# EAGLE board SleepSureStandAloneV2 (EAGLE 9.6.2)
REV: C
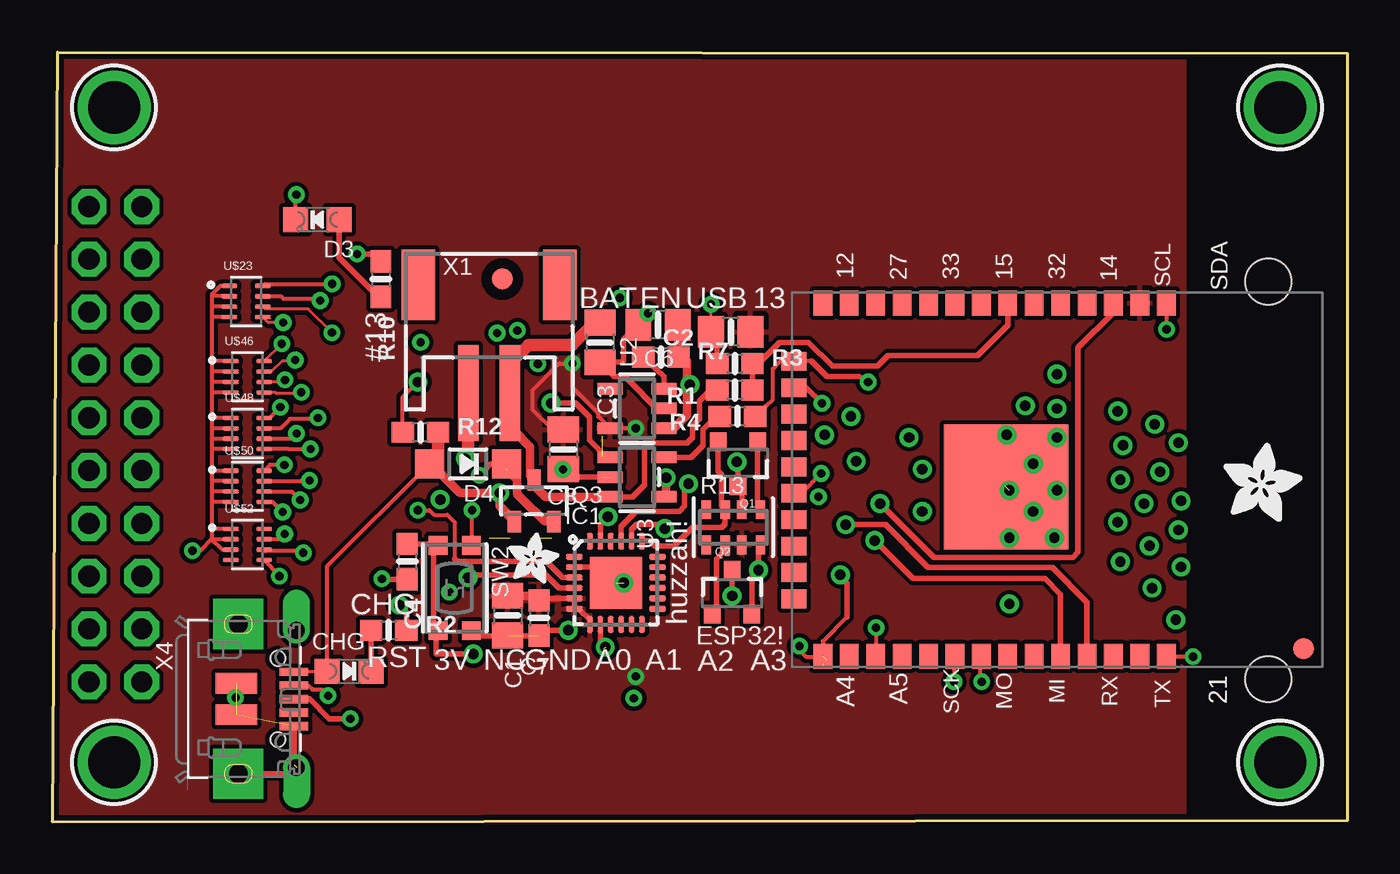
[diagram p0: board, top side]
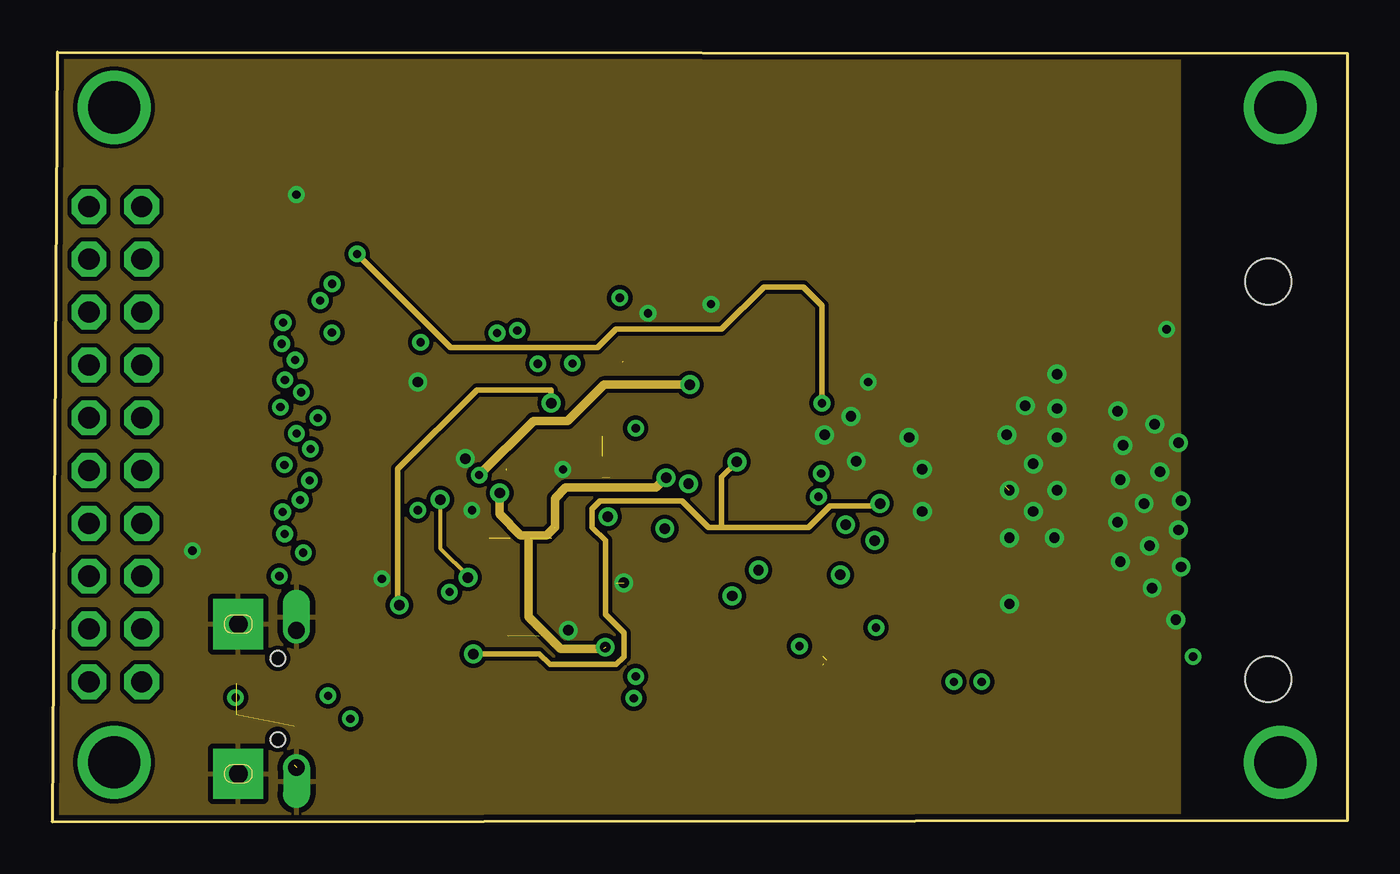
[diagram p1: board, inner layer Route2]
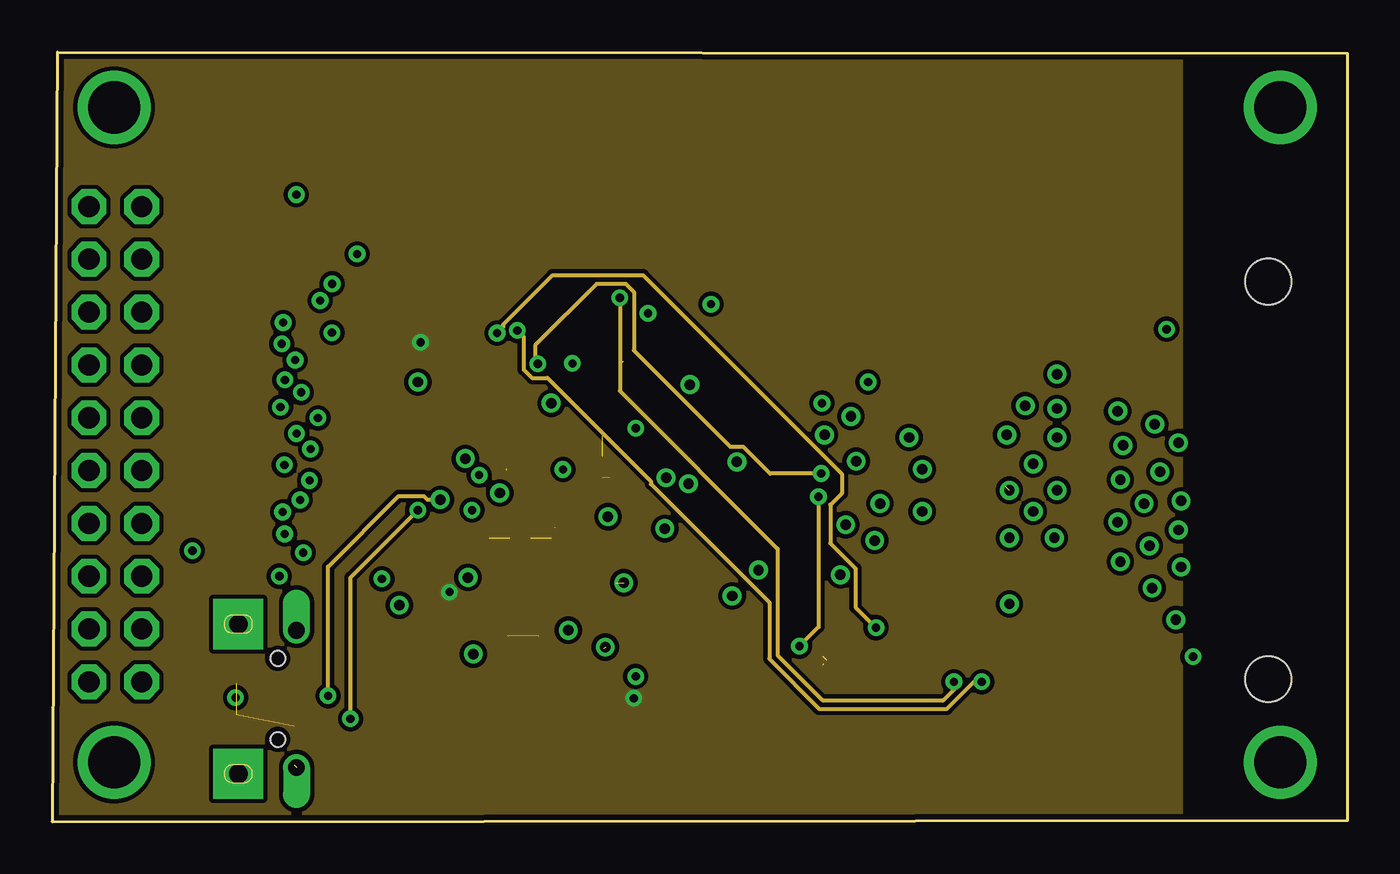
[diagram p2: board, inner layer Route15]
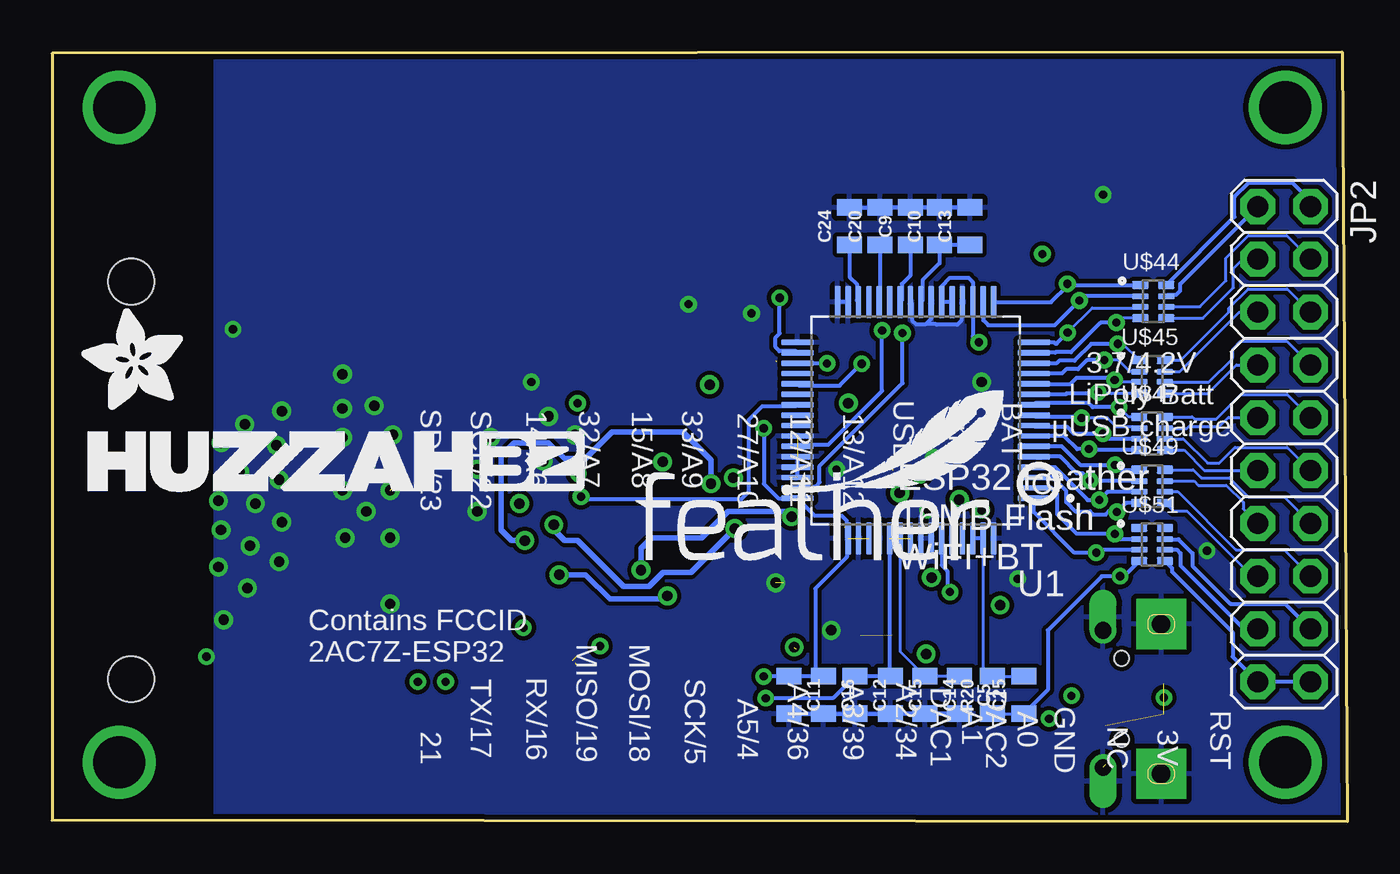
[diagram p3: board, bottom side, seen from below]

Size 62.29 x 37.02 mm. Coordinates in mm from the lower left corner, seen from the top.
Outline: 0.25,37.02 62.29,36.96 62.29,0.06 0,0 0.25,37.02
Copper layers (1+2*15+16): Top 0.035mm / dielectric 1.5mm / Route2 0.035mm / dielectric 0.15mm / Route15 0.035mm / dielectric 0.2mm / Bottom 0.035mm
Design rules "adafruit 7-7 *": minimum track width 6mil, minimum drill 15.5mil, track to track 8mil, track to pad 7mil, pad to pad 7mil, via to via 7mil, smd to smd 7mil, copper to edge 10mil, drill to drill 8mil, minimum pad ring 10mil, minimum via ring 8mil, stop-mask expansion 2mil, vias tented up to drill 20mil, thermal gap 10mil
Net classes: 0 default: width 0.152 mm, drill 0.305 mm, clearance 0.152 mm; 1 DiffPairs: width 0.152 mm, drill 0.305 mm, clearance 0.152 mm; 2 PWR: width 0.203 mm, drill 0.305 mm, clearance 0.203 mm
Holes 2.2 mm at 58.48,6.86 58.48,25.97

## Footprints (pad centres in the part's own frame; a part is rotated, then mirrored left to right if it is on the bottom)
0805-NO = smd 1.24 x 1.5: 1 -0.95,0; 2 0.95,0
0603-NO = smd 1.075 x 1: 1 -0.85,0; 2 0.85,0
0805 = smd 0.8 x 1.2: 1 -0.9,0; 2 0.9,0
CHIPLED_0805_NOOUTLINE = smd 1.2 x 1.2: A 0,-1.05; C 0,1.05
SOD-123 = smd 1.4 x 1.4: A 1.85,0; C -1.85,0
QFN24_4MM_SMSC = smd 0.8 x 0.28: 1 -2,1.25; 2 -2,0.75; 3 -2,0.25; 4 -2,-0.25; 5 -2,-0.75; 6 -2,-1.25; 13 2,-1.25; 14 2,-0.75; 15 2,-0.25; 16 2,0.25; 17 2,0.75; 18 2,1.25 | smd 0.28 x 0.8: 7 -1.25,-2; 8 -0.75,-2; 9 -0.25,-2; 10 0.25,-2; 11 0.75,-2; 12 1.25,-2; 19 1.25,2; 20 0.75,2; 21 0.25,2; 22 -0.25,2; 23 -0.75,2; 24 -1.25,2 | smd 2.5 x 2.5: THERM 0,0
2X09-BIG = drill 1.016 pad 1.676 octagon: 1 -10.16,-1.27; 2 -10.16,1.27; 3 -7.62,-1.27; 4 -7.62,1.27; 5 -5.08,-1.27; 6 -5.08,1.27; 7 -2.54,-1.27; 8 -2.54,1.27; 9 0,-1.27; 10 0,1.27; 11 2.54,-1.27; 12 2.54,1.27; 13 5.08,-1.27; 14 5.08,1.27; 15 7.62,-1.27; 16 7.62,1.27; 17 10.16,-1.27; 18 10.16,1.27; 19 12.7,-1.27; 20 12.7,1.27
SOT23-3 = smd 0.8 x 0.9: 1 -0.95,-1; 2 0.95,-1; 3 0,1.1
SOT23-R = smd 0.635 x 1.016: 1 -0.95,-1; 2 0.95,-1; 3 0,1
RESPACK_4X0603 = smd 0.45 x 0.9: 1 -1.3,-0.85; 2 -0.4,-0.85; 3 0.4,-0.85; 4 1.3,-0.85; 5 1.3,0.85; 6 0.4,0.85; 7 -0.4,0.85; 8 -1.3,0.85
BTN_KMR2_4.6X2.8 = smd 0.9 x 0.9: A 2.05,0.8; A' -2.05,0.8; B 2.05,-0.8; B' -2.05,-0.8
QFP50P1200X1200X120-64N = smd 1.56 x 0.28: 1 -5.68,3.75; 2 -5.68,3.25; 3 -5.68,2.75; 4 -5.68,2.25; 5 -5.68,1.75; 6 -5.68,1.25; 7 -5.68,0.75; 8 -5.68,0.25; 9 -5.68,-0.25; 10 -5.68,-0.75; 11 -5.68,-1.25; 12 -5.68,-1.75; 13 -5.68,-2.25; 14 -5.68,-2.75; 15 -5.68,-3.25; 16 -5.68,-3.75; 33 5.68,-3.75; 34 5.68,-3.25; 35 5.68,-2.75; 36 5.68,-2.25; 37 5.68,-1.75; 38 5.68,-1.25; 39 5.68,-0.75; 40 5.68,-0.25; 41 5.68,0.25; 42 5.68,0.75; 43 5.68,1.25; 44 5.68,1.75; 45 5.68,2.25; 46 5.68,2.75; 47 5.68,3.25; 48 5.68,3.75 | smd 0.28 x 1.56: 17 -3.75,-5.68; 18 -3.25,-5.68; 19 -2.75,-5.68; 20 -2.25,-5.68; 21 -1.75,-5.68; 22 -1.25,-5.68; 23 -0.75,-5.68; 24 -0.25,-5.68; 25 0.25,-5.68; 26 0.75,-5.68; 27 1.25,-5.68; 28 1.75,-5.68; 29 2.25,-5.68; 30 2.75,-5.68; 31 3.25,-5.68; 32 3.75,-5.68; 49 3.75,5.68; 50 3.25,5.68; 51 2.75,5.68; 52 2.25,5.68; 53 1.75,5.68; 54 1.25,5.68; 55 0.75,5.68; 56 0.25,5.68; 57 -0.25,5.68; 58 -0.75,5.68; 59 -1.25,5.68; 60 -1.75,5.68; 61 -2.25,5.68; 62 -2.75,5.68; 63 -3.25,5.68; 64 -3.75,5.68
SOT23-5 = smd 0.55 x 1.2: 1 -0.95,-1.3; 2 0,-1.3; 3 0.95,-1.3; 4 0.95,1.3; 5 -0.95,1.3
MOUNTINGHOLE_2.5_PLATED = drill 2.5 pad 3.2: P$1 0,0
CAPCAXE50P210X130X94-8N = smd 0.77 x 0.21: 1 -0.8,0.75; 2 -0.8,0.25; 3 -0.8,-0.25; 4 -0.8,-0.75; 5 0.8,-0.75; 6 0.8,-0.25; 7 0.8,0.25; 8 0.8,0.75
FIDUCIAL_1MM = smd 1 x 1: 1 0,0
RESCAXS50P200X100X45-8N = smd 0.79 x 0.39: 1 -0.62,0.8; 4 -0.62,-0.8; 5 0.62,-0.8; 8 0.62,0.8 | smd 0.79 x 0.29: 2 -0.62,0.25; 3 -0.62,-0.25; 6 0.62,-0.25; 7 0.62,0.25
JSTPH2 = smd 1 x 4.6: 1 -1,-3.7; 2 1,-3.7 | smd 1.6 x 3.4: NC1 -3.4,1.5; NC2 3.4,1.5
WROOM32_SKINNY = smd 1.2 x 0.9: 1 -8.5,5; 2 -8.5,3.73; 3 -8.5,2.46; 4 -8.5,1.19; 5 -8.5,-0.08; 6 -8.5,-1.35; 7 -8.5,-2.62; 8 -8.5,-3.89; 9 -8.5,-5.16; 10 -8.5,-6.43; 11 -8.5,-7.7; 12 -8.5,-8.97; 13 -8.5,-10.24; 14 -8.5,-11.51; 25 8.5,-11.51; 26 8.5,-10.24; 27 8.5,-8.97; 28 8.5,-7.7; 29 8.5,-6.43; 30 8.5,-5.16; 31 8.5,-3.89; 32 8.5,-2.62; 33 8.5,-1.35; 34 8.5,-0.08; 35 8.5,1.19; 36 8.5,2.46; 37 8.5,3.73; 38 8.5,5 | smd 0.9 x 1.2: 15 -5.7,-12.9; 16 -4.43,-12.9; 17 -3.16,-12.9; 18 -1.89,-12.9; 19 -0.62,-12.9; 20 0.65,-12.9; 21 1.92,-12.9; 22 3.19,-12.9; 23 4.46,-12.9; 24 5.73,-12.9 | smd 6 x 6: P$1 0.34,-2.7
4UCONN_20329_V2 = smd 1 x 2: BASE@1 -0.75,-2; BASE@2 0.75,-2 | smd 0.4 x 1.35: D+ 0,0.775; D- -0.65,0.775; GND 1.3,0.775; ID 0.65,0.775; VBUS -1.3,0.775 | drill 0.8 pad 1.143 offset: SPRT@1 -3.3,0.9; SPRT@2 3.3,0.9 | drill 0.9 pad 2.413 square: SPRT@3 -3.6,-1.9; SPRT@4 3.6,-1.9 | hole 0.7: -1.95,0; 1.95,0

## Placement (x,y rotation side)
C1  10uF  [0805-NO]  21.91,9.92 270 top
C2  10uF  [0805-NO]  32.64,23.56 180 top
C3  10µF  [0805-NO]  26.35,23.05 270 top
C4  1uF  [0603-NO]  17.08,12.51 270 top
C5  1uF  [0805]  18.67,6.1 270 bottom
C6  10µF  [0805-NO]  29.14,23.9 180 top
C7  1uF  [0603-NO]  23.41,9.79 270 top
C8  10µF  [0805-NO]  24.59,17.91 270 top
C9  1uF  [0805]  21.02,28.64 90 bottom
C10  10uF  [0805]  19.62,28.64 90 bottom
C11  1uF  [0805]  26.86,6.1 270 bottom
C12  1uF  [0805]  23.69,6.1 270 bottom
C13  0.1uF  [0805]  18.16,28.64 90 bottom
C14  0.1uF  [0805]  20.32,6.1 270 bottom
C15  0.1uF  [0805]  21.97,6.1 270 bottom
C16  0.1uF  [0805]  25.21,6.1 270 bottom
C20  100uF  [0805]  22.48,28.64 90 bottom
C24  1uF  [0805]  23.94,28.64 90 bottom
C25  1nF  [0805]  15.56,6.1 90 bottom
CHG  ORANGE  [CHIPLED_0805_NOOUTLINE]  14.29,7.24 270 top
D3  RED  [CHIPLED_0805_NOOUTLINE]  12.76,28.96 90 top
D4  MBR120  [SOD-123]  20,17.21 180 top
FRAME2  FRAME-LEDGER  [CREATIVE_COMMONS]  -0.13,0.06 0 top
IC1  CP2104  [QFN24_4MM_SMSC]  27.11,11.49 0 top
JP2  [2X09-BIG]  3.05,19.43 270 bottom
Q1  mmbt2222  [SOT23-3]  32.98,17.27 180 top
Q2  mmbt2222  [SOT23-3]  32.7,10.99 0 top
Q3  DMG3415U  [SOT23-R]  23.18,15.43 0 top
R1  100K  [0603-NO]  32.83,20.76 180 top
R2  1K  [0603-NO]  16.19,9.21 0 top
R3  100K  [0603-NO]  32.83,22.03 0 top
R4  4.7K  [0603-NO]  32.96,19.49 180 top
R7  100K  [0603-NO]  29.27,22.35 0 top
R10  1K  [0603-NO]  15.81,26.1 270 top
R12  100K  [0603-NO]  17.72,18.73 0 top
R13  10K  [RESPACK_4X0603]  32.77,14.16 0 top
R20  1M  [0805]  17.08,6.1 90 bottom
SW2  KMR2  [BTN_KMR2_4.6X2.8]  19.37,11.24 270 top
U1  ADS1299-4PAG  [QFP50P1200X1200X120-64N]  20.76,19.3 180 bottom
U2  AP2112-3.3  [SOT23-5]  28.13,19.88 90 top
U3  MCP73831T-2ACI/OT  [SOT23-5]  28.13,16.57 270 top
U$6  MOUNTINGHOLE2.5  [MOUNTINGHOLE_2.5_PLATED]  2.98,34.35 0 top
U$7  [ADAFRUIT_5MM]  56.01,19.81 90 bottom
U$9  [FEATHERLOGO_MED]  34.35,12.51 0 bottom
U$13  [PCBFEAT-REV-040]  14.86,16.26 0 bottom
U$14  [ADAFRUIT_2.5MM]  21.96,11.47 0 top
U$15  [ADAFRUIT_3.5MM]  56.32,14.41 0 top
U$19  MOUNTINGHOLE2.5  [MOUNTINGHOLE_2.5_PLATED]  59.05,34.35 0 top
U$23  W2A45C103MAT2A  [CAPCAXE50P210X130X94-8N]  9.33,25.02 0 top
U$31  MOUNTINGHOLE2.5  [MOUNTINGHOLE_2.5_PLATED]  59.05,2.86 270 top
U$32  MOUNTINGHOLE2.5  [MOUNTINGHOLE_2.5_PLATED]  2.98,2.86 270 top
U$34  FIDUCIAL_1MM  [FIDUCIAL_1MM]  21.65,26.1 270 top
U$35  FIDUCIAL_1MM  [FIDUCIAL_1MM]  60.18,8.33 270 top
U$43  [HUZZAH32]  60.58,15.88 0 bottom
U$44  [RESCAXS50P200X100X45-8N]  9.33,25.02 0 bottom
U$45  [RESCAXS50P200X100X45-8N]  9.4,21.4 0 bottom
U$46  W2A45C103MAT2A  [CAPCAXE50P210X130X94-8N]  9.4,21.4 0 top
U$47  [RESCAXS50P200X100X45-8N]  9.4,18.67 0 bottom
U$48  W2A45C103MAT2A  [CAPCAXE50P210X130X94-8N]  9.4,18.67 0 top
U$49  [RESCAXS50P200X100X45-8N]  9.4,16.13 0 bottom
U$50  W2A45C103MAT2A  [CAPCAXE50P210X130X94-8N]  9.4,16.13 0 top
U$51  [RESCAXS50P200X100X45-8N]  9.4,13.33 0 bottom
U$52  W2A45C103MAT2A  [CAPCAXE50P210X130X94-8N]  9.4,13.33 0 top
X1  JSTPH  [JSTPH2]  21.02,24.32 0 top
X2  ESP32_WROOM32_SKINNY  [WROOM32_SKINNY]  48.58,16.45 270 top
X4  20329  [4UCONN_20329_V2]  10.86,5.91 270 top

## Library data of the parts
C1-C4 C6 C7 CHG D3 D4 IC1 Q3 R1-R4 R7 R10 R12 R13 SW2 U2 U3 U$7 U$14 U$15 X1 X2 X4 = microbuilder
C5 C9-C16 C20 C24 C25 = SparkFun-Capacitors; PROD_ID: CAP-11330
C8 = microbuilder; COMPANY: ADAFRUIT INDUSTRIES; DRAWN: KTOWN; REV: A
FRAME2 = SparkFun-Aesthetics; DESIGNER: Ian Romano; REV: 2
JP2 U$23 U$44-U$52 = SleepSureLib
Q1 Q2 = SparkFun
R20 = SparkFun-Resistors
U1 = ADS1299-4PAG; AVAILABILITY: Warning; DESCRIPTION: Low-Noise, 4-Channel, 24-Bit Analog-to-Digital Converter for Biopotential Measurements 64-TQFP -40 to 85; MF: Texas Instruments; MP: ADS1299-4PAG; PACKAGE: TQFP-64 Texas Instruments; PRICE: None; PURCHASE-URL: https://pricing.snapeda.com/search/part/ADS1299-4PAG/?ref=eda
U$6 U$19 U$31 U$32 U$34 U$35 = microbuilder; BOM: EXCLUDE
U$9 U$43 = silks
U$13 = microbuilder; REV: C

## Nets
1_N [DiffPairs]: JP2.3 U$44.5
1_P [DiffPairs]: JP2.4 U$44.6
2_N [DiffPairs]: JP2.5 U$45.7
2_P [DiffPairs]: JP2.6 U$45.8
3.3V: C1.1 C2.1 C7.1 C8.1 C11.1 C16.1 IC1.5 IC1.6 IC1.7 R13.3 U1.35 U1.48 U1.50 U1.52 U2.5 X2.2
3_N [DiffPairs]: JP2.7 U$45.5
3_P [DiffPairs]: JP2.8 U$45.6
4_N [DiffPairs]: JP2.9 U$47.7
4_P [DiffPairs]: JP2.10 U$47.8
5_N: JP2.11 U$47.5
5_P: JP2.12 U$47.6
5V [PWR]: C12.1 C15.1 U1.19 U1.21 U1.22 U1.54 U1.56 U1.59
6_N: JP2.13 U$49.7
6_P: JP2.14 U$49.8
7_N: JP2.15 U$49.5
7_P: JP2.16 U$49.6
8_N [PWR]: JP2.17 U$51.6
8_P [PWR]: JP2.18 U$51.7
_SRB1: U1.17 U$23.8 U$44.1
_SRB2: U1.18 U$23.7 U$44.2
A0_DAC2: X2.11
A1_DAC1: X2.10
A2_I34: X2.6
A3_I39: X2.5
A4_IO36: X2.4
A5_IO4: X2.26
A13_I35: R1.1 R3.2 X2.7
ADS_CS: Q2.3 U1.39 X2.25
ADS_RESET: U1.36
BIAS: JP2.19 JP2.20 U$51.5
BIAS_DRV: C25.1 R20.1 U$51.4 U$52.5
BIAS_IN: C25.2 R20.2 U1.62 U1.63
CLK0: U1.37 X2.20
DRDY: U1.47 X2.27
DTR: IC1.23 Q2.2 R13.4
EN: R7.1 U2.3
GND: C1.2 C2.2 C3.2 C4.2 C5.2 C6.2 C7.2 C8.2 C9.2 C10.2 C11.2 C12.2 C13.2 C14.2 C15.2 C16.2 C20.2 C24.2 D3.C IC1.2 IC1.THERM R3.1 R4.1 R12.1 SW2.A SW2.A' U1.20 U1.23 U1.25 U1.31 U1.32 U1.33 U1.42 U1.44 U1.45 U1.46 U1.49 U1.51 U1.53 U1.57 U1.58 U1.60 U1.64 U2.2 U3.2 U$23.1 U$23.2 U$23.3 U$23.4 U$46.1 U$46.2 U$46.3 U$46.4 U$48.1 U$48.2 U$48.3 U$48.4 U$50.1 U$50.2 U$50.3 U$50.4 U$52.1 U$52.2 U$52.3 X1.1 X2.1 X2.15 X2.38 X2.P$1 X4.BASE@1 X4.BASE@2 X4.GND X4.SPRT@1 X4.SPRT@2 X4.SPRT@3 X4.SPRT@4
GPIO2: X2.24
IN1_N [DiffPairs]: U1.15 U$23.5 U$44.4
IN1_P [DiffPairs]: U1.16 U$23.6 U$44.3
IN2_N [DiffPairs]: U1.13 U$45.2 U$46.7
IN2_P [DiffPairs]: U1.14 U$45.1 U$46.8
IN3_N [DiffPairs]: U1.11 U$45.4 U$46.5
IN3_P [DiffPairs]: U1.12 U$45.3 U$46.6
IN4_N [DiffPairs]: U1.9 U$47.2 U$48.7
IN4_P [DiffPairs]: U1.10 U$47.1 U$48.8
IN5_N [PWR]: U1.7 U$47.4 U$48.5
IN5_P [PWR]: U1.8 U$47.3 U$48.6
IN6_N [PWR]: U1.5 U$49.2 U$50.7
IN6_P [PWR]: U1.6 U$49.1 U$50.8
IN7_N [PWR]: U1.3 U$49.4 U$50.5
IN7_P [PWR]: U1.4 U$49.3 U$50.6
IN8_N [PWR]: U1.1 U$51.3 U$52.6
IN8_P [PWR]: U1.2 U$51.2 U$52.7
IO12_A11: X2.14
IO13_A12: R10.1 X2.16
IO14_A6: X2.13
IO15_A8: X2.23
IO17: X2.28
IO21: X2.33
IO27_A10: X2.12
IO32_A7: X2.8
IO33_A9: X2.9
MISO: U1.43 X2.31
MOSI: U1.34 X2.30
N$1: CHG.C R2.1
N$2: IC1.3 X4.D+
N$3: R2.2 U3.1
N$4: R4.2 U3.5
N$5: D3.A R10.2
N$6: IC1.4 X4.D-
N$7: C6.1 D4.C Q3.2 R7.2 U2.1
N$8: C24.1 U1.30
N$9: C20.1 U1.28
N$10: C10.1 C13.1 U1.24
N$11: C5.1 C14.1 U1.55
N$12: Q1.1 R13.5
N$13: Q2.1 R13.2
N$14: C9.1 U1.26
RESET: C4.1 Q1.3 R13.6 SW2.B SW2.B' X2.3
RTS: IC1.19 Q1.2 R13.7
RXD0: IC1.21 X2.34
SCK: X2.29
SCL: X2.36
SCLK: U1.40
SDA: X2.37
SRB1: JP2.2 U$44.8
SRB2: JP2.1 U$44.7
TXD0: IC1.20 X2.35
VBAT: C3.1 Q3.3 R1.2 U3.3 X1.2
VBUS: CHG.A D4.A IC1.8 Q3.1 R12.2 U3.4 X4.VBUS

## Tracks (layer width: path | path; a pad name or v marks a point on that pad's centre or on a via)
1_N
  Bottom 0.152: U$44.5 6.95,24.22 5.49,25.68 5.49,26.61 5.04,27.05 JP2.3
1_P
  Bottom 0.152: U$44.6 7.09,24.77 5.84,26.02 5.84,27.11 4.76,28.19 2.92,28.19 JP2.4
2_N
  Bottom 0.152: U$45.7 8.07,21.65 5.21,24.51 JP2.5
2_P
  Bottom 0.152: U$45.8 8.03,22.2 5.71,24.51 5.71,24.69 4.78,25.63 2.9,25.63 JP2.6
3.3V  (via drill 0.39)  (1 unrouted)
  Top 0.203: C8.1 24.07,18.86 23.11,19.81 23.11,20.76 24.39,22.04 v25.02,22.04 25.02,20.89 26.28,19.64 26.28,19.48 U2.5 v28.06,18.93 v28.07,18.92
  Top 0.254: IC1.7 25.86,9.7 25.32,10.24 IC1.6 IC1.5 23.48,10.74 | C7.1 23.03,10.64 | 33.21,13.35 R13.3 33.08,13.39
  Top 0.406: 24.59,18.97 C8.1 | 23.14,10.92 C7.1 | 23.48,10.74 23.48,10.71 C7.1 | C7.1 23.19,10.87 C1.1 21.52,10.48 | C2.1 33.83,23.8
  Bottom 0.203: v28.07,6.98 28.06,7 C11.1 C16.1 25.59,7.38 25.59,11.22 24.07,12.74 24.07,13.57 U1.50 24.07,13.68 24.07,14.47 24.31,14.72 25.61,14.72 U1.48 27.37,15.55 28.07,16.26 v28.07,18.92 | U1.35 25.04,22.05 v25.02,22.04
  pour Top: -0.06,37.15 54.48,37.15 54.48,-0.13 -0.06,-0.13
3_N
  Bottom 0.152: U$45.5 6.71,20.6 5.34,21.97 JP2.7
3_P
  Bottom 0.152: U$45.6 6.66,21.15 5.52,22.29 5.52,22.73 5.14,23.11 2.92,23.11 JP2.8
4_N
  Bottom 0.152: JP2.9 5.7,19.43 5.71,19.44 5.73,19.44 6.15,19.02 7.62,19.02 7.72,18.92 U$47.7
4_P
  Bottom 0.152: JP2.10 2.9,20.55 5.12,20.55 6.3,19.37 7.36,19.37 7.46,19.47 U$47.8
5_N
  Bottom 0.152: JP2.11 6.87,16.89 7.85,17.87 U$47.5
5_P
  Bottom 0.152: JP2.12 2.9,18.01 5.41,18.01 6.17,17.25 6.73,17.25 7.9,18.42 U$47.6
5V  (via drill 0.39)  (1 unrouted)
  Bottom 0.203: U1.54 22.01,7.04 C15.1 C12.1 24.74,5.94 v27.97,5.94 | U1.21 U1.22 19.51,25.76 19.11,26.16 18.22,26.16 18.01,25.95 U1.19 18.01,23.35 v17.72,23.06 | U1.59 19.51,12.33 19.24,12.06 19.24,11.18 v19.11,11.05
  pour Route15: -1.02,37.91 -1.02,-1.08 54.29,-1.08 54.29,37.91
6_N
  Bottom 0.152: U$49.7 7.37,16.38 7.17,16.18 5.83,16.18 5.02,15.37 5.02,15.05 JP2.13
6_P
  Bottom 0.152: U$49.8 7.41,16.93 7.02,16.54 5.68,16.54 4.77,15.62 3.05,15.62 JP2.14
7_N
  Bottom 0.152: JP2.15 4.6,11.81 7.73,14.94 8.39,14.94 U$49.5
7_P
  Bottom 0.152: JP2.16 3.05,13.08 5.37,13.08 8.17,15.88 U$49.6
8_N
  Bottom 0.203: JP2.17 4.99,9.27 8.04,12.32 8.04,12.91 8.21,13.08 U$51.6
8_P
  Bottom 0.203: JP2.18 2.99,10.48 5.63,10.48 7.45,12.31 7.45,12.91 8.13,13.58 U$51.7
_SRB1  (via drill 0.39)
  Top 0.203: U$23.8 10.23,25.87 v13.47,25.87
  Bottom 0.203: U1.17 14.26,24.98 13.42,25.82 | v13.47,25.87 13.42,25.82 | 13.42,25.82 U$44.1
_SRB2  (via drill 0.39)
  Top 0.203: U$23.7 11.01,25.27 11.12,25.16 12.8,25.16 v12.89,25.07
  Bottom 0.203: U1.18 17.51,24.12 17.27,23.88 14.08,23.88 v12.89,25.07 12.69,25.27 U$44.2 10.01,25.21
A13_I35
  Top 0.254: X2.7 45.96,23.88 44.49,22.42 40.2,22.42 39.69,21.91 37.53,21.91 36.39,23.05 34.99,23.05 33.97,22.03 R3.2 R1.1
ADS_CS  (via drill 0.39, 0.5)  (2 unrouted)
  Top 0.203: 36.89,7.55 37.07,7.55 | 37.12,7.62 37.26,7.76 | 38.23,9.84 37.07,8.68 X2.25 37.06,7.94 36.26,7.94 35.94,8.25 v35.94,8.45
  Top 0.254: v37.91,11.87 37.91,11.81 38.23,11.49 38.23,9.84 | Q2.3 v32.7,10.86
  Route15 0.203: v36.86,15.63 36.86,11.6 | 36.86,11.6 36.86,11.59 | 36.86,11.6 36.86,9.36 v35.94,8.45
  Bottom 0.203: U1.39 26.53,19.97 28.15,19.97 28.79,19.32 28.79,15.86 29.16,15.49 36.56,15.49 36.68,15.62 | 36.68,15.62 36.87,15.62 | 36.68,15.62 36.69,15.63 v36.86,15.63
  Bottom 0.254: v37.91,11.87 36.64,11.87 35.47,10.71 32.85,10.71 v32.7,10.86
BIAS
  Bottom 0.203: U$51.5 8.44,12.2 8.44,12.03 5.52,9.12 5.52,7.94 JP2.19 JP2.20
BIAS_DRV  (via drill 0.39)
  Top 0.203: v10.93,11.81 10.93,11.85 U$52.5
  Bottom 0.152: R20.1 C25.1
  Bottom 0.203: U$51.4 10.75,11.81 v10.93,11.81 11.82,11.81 14.41,9.21 14.41,6.34 C25.1
BIAS_IN
  Bottom 0.152: U1.63 17.51,7.43 R20.2 C25.2
  Bottom 0.203: U1.63 U1.62
CLK0  (via drill 0.39)
  Top 0.203: v36.99,16.75 36.03,15.8 X2.20
  Route15 0.203: v36.99,16.75 34.53,16.75 33.23,18.04 32.61,18.04 27.98,22.67 27.98,25.48 27.58,25.88 26.2,25.88 23.24,22.92 23.24,22.16 v23.36,22.03
  Bottom 0.203: U1.37 26.36,20.97 24.42,20.97 v23.36,22.03
DRDY  (via drill 0.39)
  Top 0.203: v39.62,9.33 39.62,7.96 X2.27
  Route15 0.203: v21.4,23.5 21.7,23.8 21.7,23.91 24.08,26.28 28.42,26.28 37.98,16.73 37.98,15.79 37.43,15.24 37.43,13.39 38.64,12.18 38.64,10.32 v39.62,9.33
  Bottom 0.203: v21.4,23.5 21.4,21.1 25.39,17.11 25.39,16.32 25.57,16.13 26.36,16.13 U1.47
DTR  (via drill 0.5)
  Top 0.254: R13.4 33.97,13.22 v33.97,12.1 33.65,11.78 Q2.2 | IC1.23 26.36,14.3 v26.73,14.67
  Bottom 0.254: v26.73,14.67 26.99,14.92 29.78,14.92 31.05,13.65 33.46,13.65 33.97,13.14 v33.97,12.1
EN
  Top 0.254: U2.3 29.43,21.41 R7.1
GND  (via drill 0.39, 0.5)  (9 unrouted)
  Top 0.152: C8.2 v24.57,16.94 | R4.1 33.85,19.53 | 35.04,22.16 35.12,22.16 | 38.8,21.4 38.99,21.4 v39.24,21.15 | C2.2 v31.69,24.89
  Top 0.203: U$23.1 8.09,25.77 7.68,25.36 7.68,25.27 | 7.68,25.27 7.68,24.76 | 7.68,24.76 7.68,24.26 | 7.68,24.26 7.68,22.16 | 7.68,22.16 7.68,21.59 | 7.68,21.59 7.68,21.15 | 7.68,21.15 7.68,20.64 | 7.68,20.64 7.68,19.43 | 7.68,19.43 7.68,18.92 | 7.68,18.92 7.68,18.42 | 7.68,18.42 7.68,17.91 | 7.68,17.91 7.68,16.83 | 7.68,16.83 7.68,16.38 | 7.68,16.38 7.68,15.88 | 7.68,15.88 7.68,15.3 | 7.68,15.3 7.68,14.03 | 7.68,14.03 7.68,13.59 | 7.69,13.58 8.19,13.08 U$52.3 | U$52.2 7.69,13.58 | 7.69,13.58 7.68,13.59 | U$52.1 7.74,14.08 7.68,14.03 | U$50.4 7.76,15.38 7.68,15.3 | U$50.3 7.69,15.88 7.68,15.88 | U$50.2 7.69,16.38 7.68,16.38 | U$50.1 7.74,16.88 7.68,16.83 | U$48.4 7.7,17.92 7.68,17.91 | U$48.3 7.69,18.42 7.68,18.42 | U$48.2 7.69,18.92 7.68,18.92 | U$48.1 7.7,19.42 7.68,19.43 | U$46.4 7.7,20.65 7.68,20.64 | U$46.3 7.69,21.15 7.68,21.15 | U$46.2 7.74,21.65 7.68,21.59 | U$46.1 7.7,22.15 7.68,22.16 | U$23.2 7.69,25.27 7.68,25.27 | U$23.3 7.69,24.77 7.68,24.76 | U$23.4 7.7,24.27 7.68,24.26 | 7.68,13.59 7.13,13.04 v6.75,13.04 | D3.C 11.71,30.13 v11.75,30.16 | X2.1 53.58,23.7 v53.59,23.69 | X2.38 54.85,7.95 v54.86,7.94 | R4.1 34.3,19.99 34.33,19.99 34.66,20.31 34.66,21.78 35.04,22.16 35.66,22.16 X2.15 35.69,22.16 36.51,22.16 | SW2.A' 20.19,13.32 v20.19,14.99 | C6.2 28.19,23.98 v28.66,24.45 | R12.1 16.87,20.42 v17.59,21.15
  Top 0.254: 8.01,9.51 X4.SPRT@3 | X4.GND 11.63,2.73 | X4.SPRT@4 11.46,2.31 X4.SPRT@2 | IC1.2 27.11,12.24 27.11,11.75 27.24,11.75 v27.5,11.49 | 36.51,22.16 37.27,21.4 38.8,21.4 | SW2.A 20.42,8.94 C7.2 23.68,9.21 v24.83,9.21 | 27.43,22.1 C3.2 27.05,21.41 27.56,21.41 27.74,21.23 27.74,21.21 29.07,19.88 U2.2 | 27.47,22.16 27.47,23.2 28.17,23.9 C6.2 | 17.08,11.49 C4.2 15.88,11.66 v15.86,11.68 | C2.2 31.98,23.27 R3.1 | U3.2 24.98,16.57 C8.2
  Top 0.61: X1.1 20.02,18.1 20.02,17.61 v19.88,17.46
  Bottom 0.203: C11.2 C16.2 C12.2 C15.2 C14.2 C5.2 | C24.2 C20.2 C9.2 C10.2 C13.2 | U1.49 24.48,13.66 | 20.01,14.7 20,14.71 | 20.51,14.7 20.51,14.71 | 19.05,13.66 U1.60 19.06,13.58 | U1.33 | U1.46 U1.45 U1.44 | U1.31 U1.32 | 20.28,23.92 20.75,23.92 20.93,24.11 20.93,24.9 U1.25 | U1.23 20.03,24.97 20.03,24.18 20.28,23.92 | U1.20 18.57,24.93 18.57,24.1 18.77,23.9 19.76,23.9 19.79,23.92 20.28,23.92
  other vias: 46.04,13.65 41.85,14.92 48.32,18.48 45.91,18.61 48.2,13.65 38.42,19.49 54.29,12.26 54.17,14.03 54.29,15.43 54.17,18.22 48.32,19.88 46.8,20 51.37,12.51 52.9,11.24 54.04,9.72 52.77,13.27 51.24,14.41 52.51,15.3 51.37,16.45 53.28,16.83 51.5,18.1 53.02,19.11 47.18,17.21 47.18,14.92 51.24,19.75 38.67,17.34 37.15,18.61 46.04,15.94 48.32,15.94 48.32,21.53 46.04,10.48 41.21,18.48 41.85,16.95
  pour Route2: -0.64,37.66 -0.64,-0.7 54.23,-0.7 54.23,37.66
  pour Bottom: -0.25,37.4 54.48,37.4 54.48,-0.38 -0.25,-0.38
IN1_N  (via drill 0.39)
  Top 0.152: v11.11,24.01 10.4,24.01 U$23.5
  Bottom 0.152: v11.11,24.01 10.9,24.22 U$44.4
  Bottom 0.203: v11.11,24.01 11.87,24.01 13.3,22.58 14.03,22.58 14.06,22.55 U1.15
IN1_P  (via drill 0.39)
  Top 0.152: v13.46,23.52 12.32,24.67 10.24,24.67 U$23.6
  Bottom 0.152: v13.46,23.52 12.28,24.71 10.02,24.71 U$44.3
  Bottom 0.203: v13.46,23.52 14,22.99 14.03,22.99 14.1,23.05 U1.16
IN2_N  (via drill 0.39)
  Top 0.152: v11.69,22.2 11.64,22.16 11.06,22.16 10.55,21.65 U$46.7
  Bottom 0.152: U$45.2 10.47,21.65 11.03,22.2 v11.69,22.2
  Bottom 0.203: v11.69,22.2 12.53,22.2 12.96,21.77 13.53,21.77 13.73,21.57 13.9,21.57 13.9,21.56 14.38,21.56 14.38,21.57 15.07,21.57 U1.13
IN2_P  (via drill 0.39)
  Top 0.152: v11.05,22.98 10.21,22.15 U$46.8
  Bottom 0.152: U$45.1 10.8,22.98 v11.05,22.98
  Bottom 0.203: v11.05,22.98 12.32,22.98 13.13,22.17 13.87,22.17 14,22.04 15.07,22.04 U1.14
IN3_N  (via drill 0.39)
  Top 0.152: v11.99,20.65 v11.98,20.65 11.97,20.65 11.92,20.59 10.8,20.59 10.75,20.65 U$46.5
  Bottom 0.152: v11.99,20.65 11.93,20.6 11.35,20.6 11.34,20.59 10.8,20.59 10.8,20.6 U$45.4
  Bottom 0.203: U1.11 13.55,20.55 13.5,20.6 12.04,20.6 v11.99,20.65
IN3_P  (via drill 0.39)
  Top 0.152: v11.2,21.25 11.1,21.15 U$46.6
  Bottom 0.152: U$45.3 11.1,21.15 v11.2,21.25
  Bottom 0.203: U1.12 13.32,21.05 13.02,21.36 11.31,21.36 v11.2,21.25
IN4_N  (via drill 0.39)
  Top 0.203: v12.79,19.42 12.74,19.38 11.45,19.38 10.99,18.92 U$48.7
  Bottom 0.152: U$47.2 10.09,18.99 11.11,18.99 11.55,19.42 v12.79,19.42
  Bottom 0.203: v12.79,19.42 12.87,19.5 15.03,19.5 U1.9
IN4_P  (via drill 0.39)
  Top 0.203: v10.99,19.94 10.46,19.42 U$48.8
  Bottom 0.152: U$47.1 10.51,19.47 v10.99,19.94
  Bottom 0.203: v10.99,19.94 12.26,19.94 12.45,20.13 15,20.13 U1.10
IN5_N  (via drill 0.39)
  Top 0.203: U$48.5 11.38,17.92 11.4,17.9 12.41,17.9 v12.43,17.92
  Bottom 0.203: U$47.4 12.37,17.87 v12.43,17.92 13,17.92 13.63,18.55 U1.7
IN5_P  (via drill 0.39)
  Top 0.203: v11.76,18.67 11.51,18.42 U$48.6
  Bottom 0.203: U$47.3 11.51,18.42 v11.76,18.67 13.17,18.67 13.5,19 15.03,19 U1.8
IN6_N  (via drill 0.39)
  Top 0.203: v12.38,16.41 12.34,16.37 10.21,16.37 U$50.7
  Bottom 0.203: U$49.2 12.35,16.38 v12.38,16.41 12.73,16.76 13.01,16.76 13.81,17.55 U1.5
IN6_P  (via drill 0.39)
  Top 0.203: v11.18,17.16 10.48,17.16 U$50.8
  Bottom 0.203: U$49.1 10.04,16.91 10.92,16.91 v11.18,17.16 12.85,17.16 13.74,18.05 U1.6
IN7_N  (via drill 0.39)
  Top 0.203: v11.09,14.9 10.61,15.38 U$50.5
  Bottom 0.203: U$49.4 10.66,15.33 v11.09,14.9 11.11,14.92 11.48,14.92 11.64,14.77 12.22,14.77 12.38,14.92 13.08,14.92 13.53,15.37 13.53,15.9 14.18,16.55 U1.3
IN7_P  (via drill 0.39)
  Top 0.203: U$50.6 11.53,15.88 v11.93,15.47
  Bottom 0.203: U$49.3 11.53,15.88 v11.93,15.47 12.49,15.47 14.07,17.05 U1.4
IN8_N  (via drill 0.39)
  Top 0.203: v12.08,12.94 12,13.02 10.26,13.02 U$52.6
  Bottom 0.203: U$51.3 11.93,13.08 v12.08,12.94 13.13,12.94 15.08,14.89 U1.1
IN8_P  (via drill 0.39)
  Top 0.203: v11.19,13.84 10.93,13.58 U$52.7
  Bottom 0.203: U$51.2 10.93,13.58 v11.19,13.84 13.02,13.84 13.96,14.78 13.96,15.76 14.25,16.05 U1.2
IO13_A12  (via drill 0.39)
  Top 0.254: R10.1 15.46,27.3 v14.67,27.3 | v37.02,20.13 36.26,20.89 35.69,20.89 X2.16
  Route2 0.254: v14.67,27.3 19.18,22.8 26.23,22.8 27.11,23.69 32.19,23.69 34.23,25.72 36.13,25.72 37.02,24.83 v37.02,20.13
IO32_A7
  Top 0.254: X2.8 44.69,25.26
MISO  (via drill 0.39)
  Top 0.203: v44.7,6.73 44.62,6.81 44.62,7.88 X2.31
  Route15 0.203: v22.38,23.63 22.68,23.32 22.68,21.75 23.08,21.35 23.82,21.35 28.79,16.37 28.79,16.24 34.49,10.54 34.49,7.83 36.89,5.44 43.04,5.44 44.33,6.73 v44.7,6.73
  Bottom 0.203: U1.43 26.36,18.13 24.96,18.13 22.38,20.72 v22.38,23.63
MOSI  (via drill 0.39)
  Top 0.203: X2.30 43.37,7.9 v43.37,6.73
  Route15 0.203: v27.3,25.2 27.3,20.72 34.9,13.13 34.9,8 37.05,5.84 42.86,5.84 43.37,6.35 v43.37,6.73
  Bottom 0.203: U1.34 26.53,22.63 27.32,22.63 27.5,22.82 27.5,23.29 27.3,23.49 v27.3,25.2
N$1
  Top 0.254: R2.1 CHG.C
N$2  (via drill 0.39)
  Top 0.203: 19.37,12.64 19.37,14.41 19.02,14.76 18.37,14.76 18.15,14.98 v17.59,14.98
  Top 0.254: IC1.3 24.55,11.74 23.77,12.52 19.48,12.52 19.37,12.64 | v14.35,4.95 13.33,4.95 12.38,5.91 X4.D+
  Route15 0.203: v14.35,4.95 14.35,11.74 v17.59,14.98
N$3  (via drill 0.5)
  Top 0.254: v24,20.13 25.17,20.13 25.84,19.46 25.84,18.35 26.67,17.52 U3.1 | R2.2 17.04,10.07 v16.7,10.41
  Route2 0.254: v24,20.13 24,20.76 20.43,20.76 16.62,16.95 16.62,10.49 v16.7,10.41
N$4
  Top 0.254: U3.5 30.73,17.52 31.31,18.1 31.31,18.86 31.94,19.49 R4.2
N$5
  Top 0.254: R10.2 15.68,25.25 13.81,27.12 D3.A
N$6  (via drill 0.39, 0.5)
  Top 0.203: v13.27,6.06 12.97,6.36 12.52,6.36 12.33,6.56 X4.D-
  Top 0.254: IC1.4 24.39,11.24 23.76,11.87 20.13,11.87 v20,11.75
  Route2 0.203: v18.67,15.49 18.67,13.14 20,11.81 v20,11.75
  Route15 0.203: v13.27,6.06 13.27,12.26 16.68,15.66 17.87,15.66 18.04,15.49 v18.67,15.49
N$7  (via drill 0.39, 0.5)  (1 unrouted)
  Top 0.254: D4.C 21.08,17.21 v20.54,16.67
  Top 0.406: 30.54,21.02 30.54,19.57 29.9,18.93 U2.1 | 30.54,21.02 30.54,22.16 30.29,22.42 R7.2 30.09,22.45 C6.1 | Q3.2 23.72,14.43 23.18,14.97 23.18,14.95 22.36,15.76 22.36,16.47 21.85,16.98 | v30.67,21.02 30.54,21.02 | D4.C 21.85,16.88
  Route2 0.406: v20.54,16.67 23.14,19.27 24.8,19.27 26.54,21.02 v30.67,21.02
N$8
  Bottom 0.203: U1.30 23.6,25.06 23.6,25.86 23.94,26.2 C24.1
N$9
  Bottom 0.203: C20.1 22.48,25.02 U1.28
N$10
  Bottom 0.203: U1.24 20.43,25.06 20.43,26.05 19.62,26.86 C10.1 C13.1
N$11
  Bottom 0.152: U1.55 21.51,8.19 C14.1 C5.1
N$12
  Top 0.254: Q1.1 33.93,15.14 R13.5
N$13
  Top 0.254: R13.2 32.37,13.06 31.94,12.64 31.94,10.35 31.69,10.1 31.69,10.05 Q2.1
N$14
  Bottom 0.203: U1.26 21.43,25.06 21.43,25.86 21.02,26.27 C9.1
N$15  (via drill 0.39)
  other vias: 8.83,5.97
RESET  (via drill 0.5)
  Top 0.254: v20.26,8.06 18.48,8.06 18.48,9.1 SW2.B 18.35,9.41 18.35,13.14 18.42,13.14 SW2.B' 18.5,13.36 C4.1 | X2.3 51.04,24.49 49.34,22.8 49.34,12.97 49.09,12.71 42.41,12.71 v39.81,15.3 | v32.93,17.31 32.98,17.26 Q1.3 33.17,15.99 R13.6
  Route2 0.254: v20.26,8.06 23.43,8.06 23.94,7.56 27.11,7.56 27.5,7.94 27.5,9.08 26.61,9.97 26.61,13.53 25.97,14.16 25.97,15.05 26.35,15.43 30.29,15.43 31.56,14.16 32.19,14.16 | 32.19,14.16 36.39,14.16 37.4,15.18 39.69,15.18 v39.81,15.3 | 32.19,14.16 32.19,16.57 v32.93,17.31
RTS
  Top 0.254: IC1.19 28.75,13.49 28.97,13.27 29.91,13.27 30.8,14.16 32.19,14.16 32.37,14.33 R13.7 32.19,15.18 32.19,16.7 32.03,16.86 Q1.2
RXD0  (via drill 0.5)
  Top 0.254: IC1.21 27.36,14.21 28.08,14.92 30.16,14.92 30.42,15.18 30.42,16.07 v30.61,16.26 | X2.34 48.5,10.94 47.74,11.7 41.39,11.7 v39.56,13.53
  Bottom 0.254: v39.56,13.53 40.2,13.53 40.7,14.03 40.7,17.59 40.07,18.22 38.42,18.22 37.66,17.46 36.64,17.46 35.37,18.73 31.94,18.73 30.61,17.4 v30.61,16.26
SRB1
  Bottom 0.203: U$44.8 5.44,29.1 5.44,30.05 4.76,30.73 2.67,30.73 1.78,29.85 JP2.2
SRB2
  Bottom 0.203: U$44.7 8.64,25.34 8.23,25.34 8.04,25.54 8.04,25.87 JP2.1
TXD0  (via drill 0.5)
  Top 0.254: IC1.20 27.86,14.05 28.11,14.29 29.27,14.29 v29.46,14.1 | v38.16,14.29 40.07,14.29 42.13,12.23 48.09,12.23 49.77,10.56 X2.35
  Bottom 0.254: v38.16,14.29 38.16,14.03 37.66,13.53 37.02,13.53 34.81,11.32 33.59,11.32 32.91,12 31.56,12 v29.46,14.1
VBAT
  Top 0.203: 31.66,20.76 R1.2
  Top 0.254: 21.91,21.27 22.16,21.02 | U3.3 27.94,15.62 27.94,15.65 28.5,16.21 28.5,18.22 30.54,18.22 30.8,18.48 30.8,19.05 31.13,19.38 31.13,20.23 31.66,20.76
  Top 0.406: X1.2 22.16,20.76 | 22.16,20.76 22.16,21.02 | 21.91,21.91 21.91,21.27 | 22.16,20.76 22.16,18.86 22.99,18.03 22.99,16.62 Q3.3 23.18,16.18 23.73,15.62 U3.3
  Top 0.61: 21.91,21.91 22.92,22.92 25.01,22.92 26.09,24 C3.1
VBUS  (via drill 0.5)  (2 unrouted)
  Top 0.152: CHG.A 13.2,7.21 X4.VBUS
  Top 0.203: CHG.A 13.24,12.29 D4.A
  Top 0.254: D4.A 18.57,17.62 | IC1.8 26.36,8.64 v26.61,8.39
  Top 0.406: Q3.1 22.23,14.48 21.53,15.18 v21.53,15.81 19.62,15.81 18.22,17.21 D4.A | v29.53,16.54 29.53,15.72 U3.4
  Top 0.61: 18.57,17.62 R12.2 18.73,18.9
  Route2 0.406: 24.19,14.16 24.19,15.56 24.7,16.07 29.05,16.07 v29.53,16.54 | 24.17,14.16 23.79,13.78 22.92,13.78 | 22.92,13.78 22.54,13.78 21.53,14.8 v21.53,15.81 | 22.92,13.78 22.92,9.84 24.45,8.32 26.53,8.32

## Text on the board
tPlace: 12 | 27 | 33 | 15 | 32 | 14 | SCL | SDA | BAT | EN | USB | 13 | #13 | huzzah! | CHG | ESP32! | RST | 3V | NC | GND | A0 | A1 | A2 | A3 | A4 | A5 | SCK | MO | MI | RX | TX | 21
bPlace: 3.7/4.2V / LiPoly Batt / µUSB charge | BAT | En | USB | 33/A9 | 15/A8 | 32/A7 | 14/A6 | 13/A12 | 12/A11 | 27/A10 | SCL/22 | SDA/23 | ESP32 Feather / 16MB Flash / WiFI+BT | Contains FCCID / 2AC7Z-ESP32 | MOSI/18 | MISO/19 | A1 / DAC1 | A2/34 | A3/39 | A4/36 | SCK/5 | RX/16 | TX/17 | RST | GND | A0 / DAC2 | A5/4 | 3V | NC | 21